# EAGLE board ESP32_GPS_Motion_Shield (EAGLE 7.7.0)
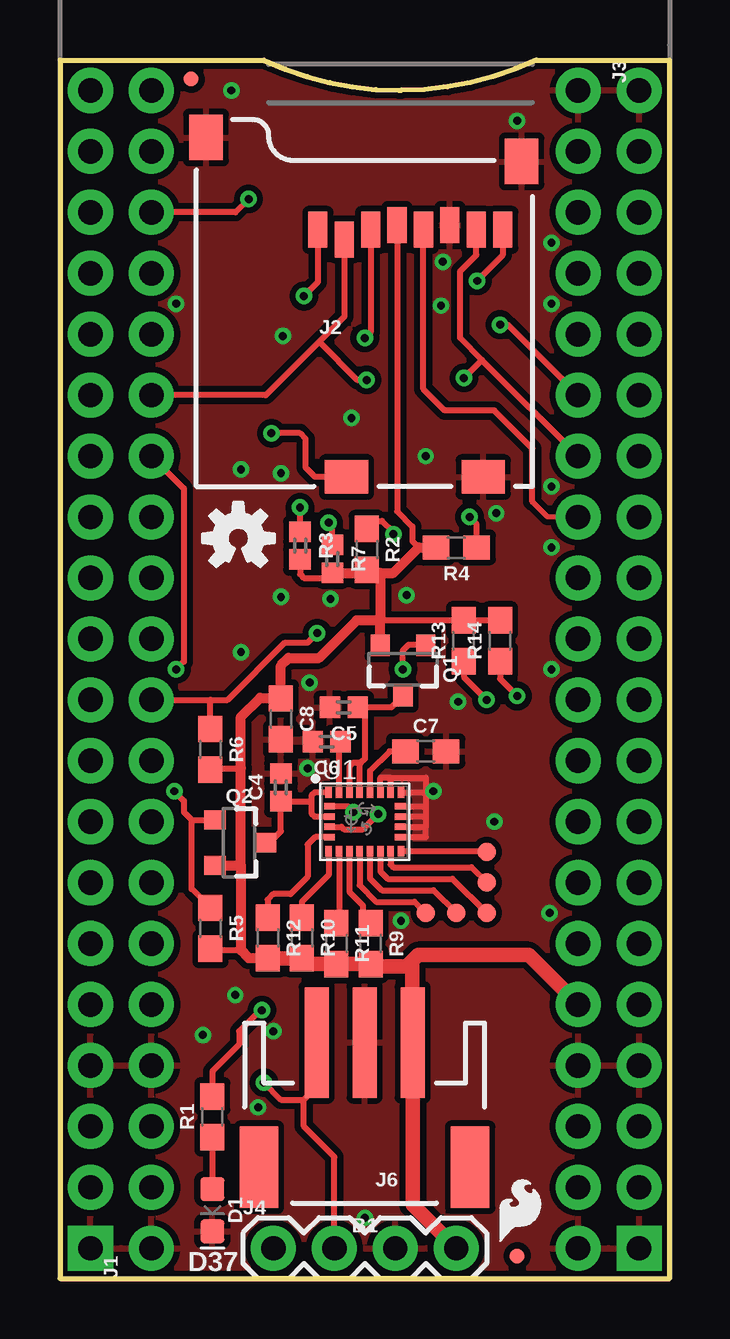
[diagram p0: board, top side]
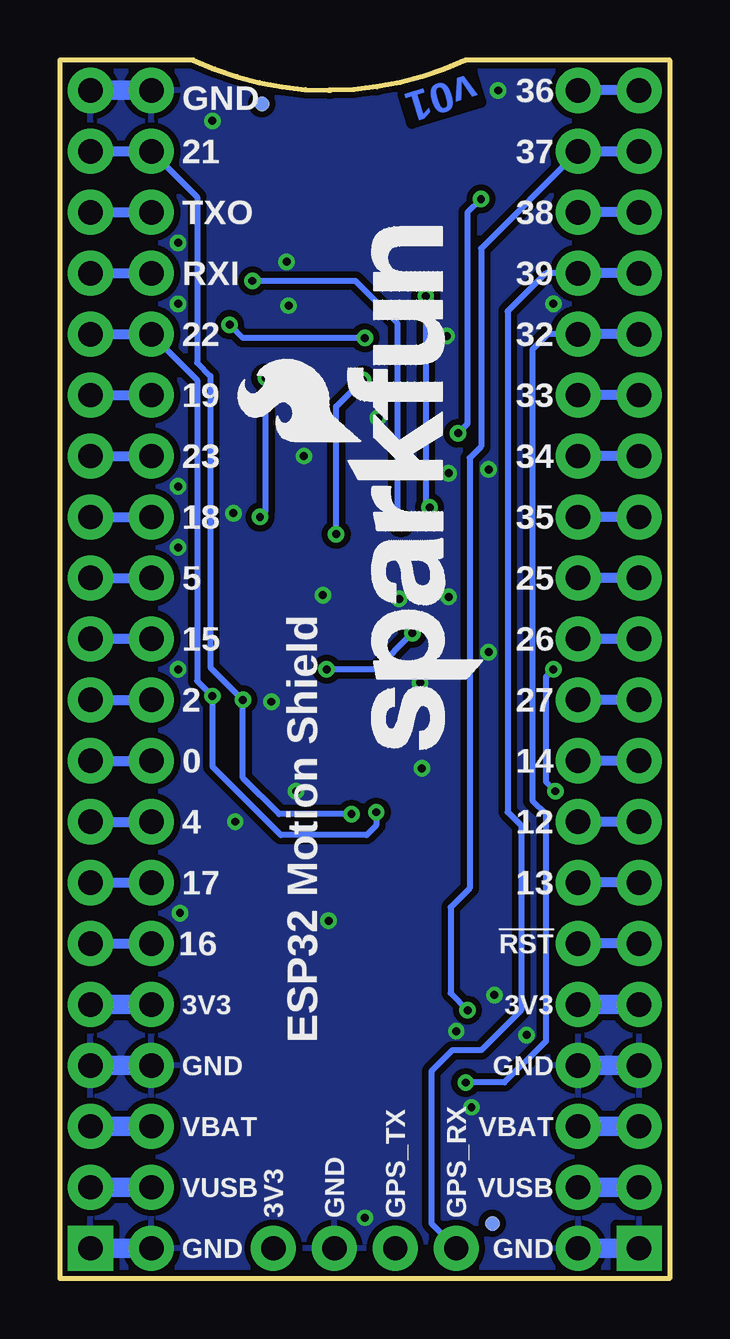
[diagram p1: board, bottom side, seen from below]

Size 25.4 x 50.8 mm. Coordinates in mm from the lower left corner, seen from the top.
Outline: 0,0 25.4,0 25.4,50.8 19.84,50.8 arc-25 14.21,49.53 14.13,49.53 arc-25 8.49,50.8 0,50.8 0,0
Copper layers (1*16): Top 0.035mm / dielectric 1.5mm / Bottom 0.035mm
Design rules "SparkFun-2-layer-TIGHT *": minimum track width 7mil, minimum drill 13mil, track to track 7mil, track to pad 7mil, pad to pad 7mil, via to via 7mil, smd to smd 7mil, copper to edge 7mil, drill to drill 7mil, minimum pad ring 7mil, minimum via ring 7mil, stop-mask expansion 4mil, vias tented up to drill 25mil, thermal gap 10mil

## Footprints (pad centres in the part's own frame; a part is rotated, then mirrored left to right if it is on the bottom)
ESP32_THING_NO_ANT = drill 1.016 pad 1.88 square: 1 1.27,1.27; 40 24.13,1.27 | drill 1.016 pad 1.88: 2 1.27,3.81; 3 1.27,6.35; 4 1.27,8.89; 5 1.27,11.43; 6 1.27,13.97; 7 1.27,16.51; 8 1.27,19.05; 9 1.27,21.59; 10 1.27,24.13; 11 1.27,26.67; 12 1.27,29.21; 13 1.27,31.75; 14 1.27,34.29; 15 1.27,36.83; 16 1.27,39.37; 17 1.27,41.91; 18 1.27,44.45; 19 1.27,46.99; 20 1.27,49.53; 21 24.13,49.53; 22 24.13,46.99; 23 24.13,44.45; 24 24.13,41.91; 25 24.13,39.37; 26 24.13,36.83; 27 24.13,34.29; 28 24.13,31.75; 29 24.13,29.21; 30 24.13,26.67; 31 24.13,24.13; 32 24.13,21.59; 33 24.13,19.05; 34 24.13,16.51; 35 24.13,13.97; 36 24.13,11.43; 37 24.13,8.89; 38 24.13,6.35; 39 24.13,3.81
0402 = smd 0.85 x 0.9: 1 -0.58,0; 2 0.58,0
0603 = smd 1.1 x 1: 1 -0.85,0; 2 0.85,0
LED-0603 = smd 1 x 1: A -0.877,0; C 0.877,0
FIDUCIAL-MICRO = smd 0.635 x 0.635: 1 0,0
1X20_NOSILK = drill 1.016 pad 1.88: 1 0,0; 2 2.54,0; 3 5.08,0; 4 7.62,0; 5 10.16,0; 6 12.7,0; 7 15.24,0; 8 17.78,0; 9 20.32,0; 10 22.86,0; 11 25.4,0; 12 27.94,0; 13 30.48,0; 14 33.02,0; 15 35.56,0; 16 38.1,0; 17 40.64,0; 18 43.18,0; 19 45.72,0; 20 48.26,0
MICRO-SD-SOCKET = smd 1.8 x 1.4: CD1 -2.05,0.4; CD2 -7.75,0.4 | smd 0.8 x 1.5: CS -7.84,10.3; DI -6.74,10.7; DO -2.34,10.7; GND -3.44,10.9; RSV1 -8.94,10.7; RSV2 -1.24,10.7; SCLK -4.54,10.7; VCC -5.64,10.9 | smd 1.4 x 1.9: GND1 -13.6,14.55; GND3 -0.45,13.55
1X04 = drill 1.016 pad 1.88: 1 0,0; 2 2.54,0; 3 5.08,0; 4 7.62,0
JST-3-SMD = smd 1 x 4.6: 1 2.01,-4.77; 2 0.01,-4.77; 3 -1.99,-4.77 | smd 1.6 x 3.4: NC1 -4.39,0.43; NC2 4.41,0.43
SOT23-3 = smd 0.8 x 0.9: 1 -0.95,-1; 2 0.95,-1; 3 0,1.1
PAD.03X.03 = smd 0.762 x 0.762: P$1 0,0
LGA24-8X4 = smd 0.27 x 0.45: 1 -1.505,1.225; 6 -1.505,-1.225; 7 -1.075,-1.225; 8 -0.645,-1.225; 9 -0.215,-1.225; 10 0.215,-1.225; 11 0.645,-1.225; 12 1.075,-1.225; 13 1.505,-1.225; 18 1.505,1.225; 19 1.075,1.225; 20 0.645,1.225; 21 0.215,1.225; 22 -0.215,1.225; 23 -0.645,1.225; 24 -1.075,1.225 | smd 0.45 x 0.27: 2 -1.475,0.645; 3 -1.475,0.215; 4 -1.475,-0.215; 5 -1.475,-0.645; 14 1.475,-0.645; 15 1.475,-0.215; 16 1.475,0.215; 17 1.475,0.645

## Placement (x,y rotation side)
B1  ESP32_THING_WO_ANT_KEEPOUT  [ESP32_THING_NO_ANT]  0,0 0 top
C4  0.1uF  [0402]  9.21,20.48 90 top
C5  0.1uF  [0402]  11.83,23.81 180 top
C6  0.1uF  [0402]  11.11,22.38 180 top
C7  10nF  [0603]  15.24,21.99 0 top
C8  10uF  [0603]  9.21,23.34 270 top
D1  BLUE  [LED-0603]  6.35,2.86 270 top
FD1  FIDUCIALUFIDUCIAL  [FIDUCIAL-MICRO]  19.05,0.95 0 top
FD2  FIDUCIALUFIDUCIAL  [FIDUCIAL-MICRO]  5.46,50.01 0 top
FD3  FIDUCIALUFIDUCIAL  [FIDUCIAL-MICRO]  16.99,48.97 0 bottom
FD4  FIDUCIALUFIDUCIAL  [FIDUCIAL-MICRO]  7.38,2.3 0 bottom
FRAME1  FRAME-LETTER  [CREATIVE_COMMONS]  -23.7,-19.91 0 top  (outside the outline)
J1  [1X20_NOSILK]  3.81,1.27 90 top
J2  MICRO-SD_CARD_SOCKET  [MICRO-SD-SOCKET]  19.68,33.02 0 top
J3  [1X20_NOSILK]  21.59,49.53 270 top
J4  [1X04]  8.89,1.27 0 top
J6  3-PIN SMD  [JST-3-SMD]  12.7,5.08 180 top
LOGO1  OSHW-LOGOS  [OSHW-LOGO-S]  7.43,30.86 0 top
LOGO2  SFE_LOGO_NAME_FLAME.2_INCH  [SFE_LOGO_NAME_FLAME_.2]  7.7,21.35 90 bottom
LOGO3  SFE_LOGO_FLAME.1_INCH  [SFE_LOGO_FLAME_.1]  18.02,1.21 0 top
Q1  4.3A/20V/54mΩ  [SOT23-3]  14.29,25.4 180 top
Q2  4.3A/20V/54mΩ  [SOT23-3]  7.46,18.18 270 top
R1  470  [0603]  6.35,6.75 90 top
R2  10k  [0603]  12.78,30.4 270 top
R3  100K  [0402]  10,30.56 270 top
R4  10k  [0603]  16.51,30.48 180 top
R5  10k  [0603]  6.27,14.61 270 top
R6  10k  [0603]  6.27,22.07 270 top
R7  100K  [0402]  11.35,30 270 top
R9  10k  [0603]  12.94,13.97 270 top
R10  10k  [0603]  10.08,14.21 270 top
R11  10k  [0603]  11.51,13.97 270 top
R12  10k  [0603]  8.65,14.21 270 top
R13  4.7k  [0603]  16.83,26.59 90 top
R14  4.7k  [0603]  18.34,26.59 90 top
TP1  TEST-POINT3  [PAD.03X.03]  17.78,15.24 90 top
TP2  TEST-POINT3  [PAD.03X.03]  17.78,16.51 90 top
TP3  TEST-POINT3  [PAD.03X.03]  17.78,17.78 90 top
TP4  TEST-POINT3  [PAD.03X.03]  15.24,15.24 90 top
TP5  TEST-POINT3  [PAD.03X.03]  16.51,15.24 90 top
U1  LSM9DS1  [LGA24-8X4]  12.7,19.05 0 top

## Library data of the parts
B1 = SparkFun-Boards
C4-C6 = SparkFun-Capacitors; PROD_ID: CAP-12416
C7 = SparkFun-Capacitors; PROD_ID: CAP-00867
C8 = SparkFun-Capacitors; PROD_ID: CAP-11015
D1 = SparkFun-LED; PROD_ID: DIO-08575
FD1-FD4 FRAME1 LOGO1-LOGO3 = SparkFun-Aesthetics
J1 J3 TP1-TP5 = SparkFun-Connectors
J2 = SparkFun-Connectors; PROD_ID: CONN-07820; SF_ID: PRT-00127
J4 = SparkFun-Connectors; PROD_ID: CONN-09696
J6 = SparkFun-Connectors; PROD_ID: CONN-12591
Q1 Q2 = SparkFun-DiscreteSemi; PROD_ID: TRANS-11153
R1 = SparkFun-Resistors; PROD_ID: RES-07869
R2 R4-R6 R9-R12 = SparkFun-Resistors; PROD_ID: RES-00824
R3 R7 = SparkFun-Resistors; PROD_ID: RES-13495
R13 R14 = SparkFun-Resistors; PROD_ID: RES-07857
U1 = LSM9DS1_temp; PROD_ID: IC-12536

## Nets
3.3V: B1.36 C8.1 J2.VCC J3.16 J4.4 J6.3 Q1.2 Q2.2 R2.2 R3.2 R4.2 R5.2 R6.2 R7.2 R9.2 R10.2 R11.2 R12.2 R13.2 R14.2
3.3V_B: B1.5 J1.5
C1: C6.1 U1.24
CAP: C7.1 U1.21
CS_A/G: R11.1 U1.7
CS_M: R9.1 U1.8
DEN_A/G: TP3.P$1 U1.13
DRDY_M: TP4.P$1 U1.9
GND: B1.1 B1.4 B1.21 B1.37 B1.40 C4.2 C5.2 C6.2 C7.2 C8.2 D1.C J1.1 J1.4 J2.CD1 J2.GND J2.GND1 J2.GND3 J3.1 J3.17 J3.20 J4.3 J6.2 U1.14 U1.15 U1.16 U1.17 U1.18 U1.19 U1.20
GPS_LED: B1.19 J1.19 R1.2
GPS_RX: B1.17 J1.17 J4.1
GPS_TX: B1.16 J1.16 J4.2 J6.1
INT1_A/G: TP1.P$1 U1.11
INT2_A/G: TP2.P$1 U1.12
INT_M: TP5.P$1 U1.10
N$1: D1.A R1.1
N$2: B1.30 J3.10
N$9: J2.RSV1 R3.1
N$10: J2.RSV2 R7.1
N$15: B1.6 J1.6
N$16: B1.7 J1.7
N$17: B1.8 J1.8
N$18: B1.9 J1.9
N$20: B1.11 J1.11
N$21: B1.12 J1.12
N$22: B1.13 J1.13
N$23: B1.20 J1.20
N$32: B1.23 J3.3
N$33: B1.24 J3.4
N$38: B1.29 J3.9
N$40: B1.31 J3.11
N$41: B1.32 J3.12
N$42: B1.33 J3.13
N$43: B1.34 J3.14
N$44: B1.35 J3.15
SCL: B1.25 J3.5 R14.1 U1.2
SD_CD: B1.18 J1.18 J2.CD2
SD_CS: B1.15 J1.15 J2.CS R2.1
SD_DI: B1.26 J2.DI J3.6
SD_DO: B1.27 J2.DO J3.7 R4.1
SD_SCK: B1.28 J2.SCLK J3.8
SDA: B1.22 J3.2 R13.1 U1.4
SDO_A/G: R12.1 U1.5
SDO_M: R10.1 U1.6
V_BATT: B1.38 J3.18
V_BATT_B: B1.3 J1.3
VDD: C5.1 Q1.3 U1.22 U1.23
VDD_CTRL: B1.10 J1.10 Q1.1 R6.1
VDDIO: C4.1 Q2.3 U1.1 U1.3
VDDIO_CTRL: B1.14 J1.14 Q2.1 R5.1
VUSB: B1.39 J3.19
VUSB_B: B1.2 J1.2

## Tracks (layer width: path | path; a pad name or v marks a point on that pad's centre or on a via)
3.3V
  Top 0.254: J2.VCC 14.04,31.99 14.68,31.35 14.68,30.74 14.95,30.48 | 7.54,17.23 7.54,17.22 | Q1.2 | 9.18,24.21 C8.1 | R10.2 10.08,13.26 | 7.54,13.68 6.27,13.68 R5.2 | R6.2 6.33,21.27 7.54,21.27 | R3.2 10,29.37 10.16,29.21 11.14,29.21 | R14.2 R13.2 13.34,27.44 | R2.2 12.89,29.44 13.88,29.44 13.89,29.42
  Top 0.406: 7.54,17.22 7.54,21.27 7.54,23.42 8.33,24.21 9.18,24.21 | C8.1 9.21,25.56 9.53,25.88 10.79,25.88 12.36,27.44 13.34,27.44 13.34,29.42 | Q2.2 7.54,17.23 7.54,13.68 7.86,13.36 R12.2 | 11.14,29.21 R7.2 13.34,29.42 | Q1.2 13.34,27.44 | 13.34,29.42 13.89,29.42 14.95,30.48 R4.2
  Top 0.61: R12.2 R10.2 10.32,13.12 R11.2 R9.2 13.04,13.02 14.45,13.02 14.68,13.26 | J3.16 19.53,13.49 14.92,13.49 14.68,13.26 | 14.68,13.26 J6.3 14.69,3.09 J4.4
  Bottom 0.813: B1.36 J3.16
3.3V_B
  Bottom 0.813: B1.5 J1.5
C1
  Top 0.254: U1.24 11.62,22.38 C6.1
CAP
  Top 0.254: C7.1 13.73,21.99 12.91,21.17 U1.21
CS_A/G
  Top 0.254: U1.7 11.62,14.94 R11.1
CS_M
  Top 0.254: U1.8 12.05,16.12 12.62,15.56 12.62,15.14 R9.1
DEN_A/G
  Top 0.254: U1.13 17.73,17.82 TP3.P$1
DRDY_M
  Top 0.254: U1.9 12.48,16.41 13.18,15.72 14.76,15.72 TP4.P$1
GND  (via drill 0.33)
  Top 0.254: U1.14 15.24,18.41 15.24,18.84 | U1.15 15.24,18.84 | U1.16 15.24,19.27 | 15.24,19.27 15.24,18.84 | U1.17 15.24,19.7 | 15.24,19.7 15.24,19.27 | U1.18 15.24,20.27 | 15.24,20.27 15.24,19.7 | U1.19 13.78,20.88 | 13.78,20.88 13.35,20.88 U1.20 | 13.78,20.88 15.24,20.88 15.24,20.27
  Bottom 0.813: J3.1 B1.21 | B1.4 J1.4 | B1.1 J1.1 | B1.40 J3.20 | B1.37 J3.17
  other vias: 7.54,33.73 20.48,33.02 15.88,40.56 4.84,40.64 8.26,7.14 12.7,2.54 5.95,10.16 20.4,15.24 18.1,19.05 16.59,24.05 20.48,25.4 20.48,30.48 10.32,21.27 10.4,24.84 15.24,34.29 12.14,35.88 9.21,33.58 9.29,39.29 18.18,31.91 7.14,49.53 19.05,48.26 15.95,42.39 20.48,40.64 20.48,43.18 15.56,20.32 14.21,14.92 7.3,11.83 11.27,28.34 7.54,26.11 9.21,28.42 8.89,10.32 14.45,28.5
  pour Top (isolate 0.254): 0,50.8 0,0 25.4,0 25.4,50.8
  pour Bottom (isolate 0.254): 25.4,50.8 25.4,0 0,0 0,50.8
GPS_LED  (via drill 0.33)
  Top 0.254: v8.41,11.19 8.33,11.19 7.46,10.32 7.46,9.76 6.35,8.65 R1.2
  Bottom 0.254: J1.19 7.86,42.94 7.86,34.69 8.33,34.21 8.33,16.27 9.13,15.48 9.13,11.91 v8.41,11.19
  Bottom 0.406: J1.19 B1.19
GPS_RX
  Bottom 0.254: J1.17 5.16,41.91 6.75,40.32 6.75,19.45 6.19,18.89 6.19,11.19 7.86,9.53 9.05,9.53 9.92,8.65 9.92,2.3 J4.1
  Bottom 0.406: B1.17 J1.17
GPS_TX  (via drill 0.33)
  Top 0.254: 10.16,7.46 10.72,8.02 10.72,9.82 J6.1 | J4.2 11.43,5.08 10.16,6.35 10.16,7.46 | v8.49,8.18 9.21,7.46 10.16,7.46
  Bottom 0.254: J1.16 5.08,39.37 5.71,38.73 5.71,19.92 5.16,19.37 5.16,9.9 6.88,8.18 v8.49,8.18
  Bottom 0.406: B1.16 J1.16
INT1_A/G
  Top 0.254: U1.11 13.35,16.98 13.65,16.67 16.35,16.67 TP1.P$1
INT2_A/G
  Top 0.254: U1.12 13.78,17.26 13.89,17.14 17.14,17.14 TP2.P$1
INT_M
  Top 0.254: U1.10 12.91,16.69 13.41,16.19 15.56,16.19 TP5.P$1
N$1
  Top 0.254: R1.1 D1.A
N$2
  Bottom 0.406: J3.10 B1.30
N$9  (via drill 0.33)
  Top 0.254: J2.RSV1 10.74,41.54 v10.16,40.96 | R3.1 v10,32.15
  Bottom 0.254: v10.16,40.96 10.16,32.31 v10,32.15
N$10  (via drill 0.33)
  Top 0.254: J2.RSV2 18.45,42.65 v17.38,41.59 | R7.1 11.35,31.35 v11.19,31.51
  Bottom 0.254: v17.38,41.59 13.1,41.59 11.35,39.85 11.35,31.67 v11.19,31.51
N$15
  Bottom 0.406: B1.6 J1.6
N$16
  Bottom 0.406: B1.7 J1.7
N$17
  Bottom 0.406: B1.8 J1.8
N$18
  Bottom 0.406: B1.9 J1.9
N$20
  Bottom 0.406: B1.11 J1.11
N$21
  Bottom 0.406: B1.12 J1.12
N$22
  Bottom 0.406: B1.13 J1.13
N$23
  Bottom 0.406: B1.20 J1.20
N$32
  Bottom 0.406: B1.23 J3.3
N$33
  Bottom 0.406: B1.24 J3.4
N$38
  Bottom 0.406: B1.29 J3.9
N$40
  Bottom 0.406: B1.31 J3.11
N$41
  Bottom 0.406: B1.32 J3.12
N$42
  Bottom 0.406: B1.33 J3.13
N$43
  Bottom 0.406: B1.34 J3.14
N$44
  Bottom 0.406: B1.35 J3.15
SCL  (via drill 0.33)
  Top 0.254: U1.2 11.98,19.7 v12.22,19.45 | R14.1 18.34,25 v19.05,24.29
  Bottom 0.254: J3.5 19.68,37.47 19.68,24.92 v19.05,24.29 19.05,21.35 16.19,18.49 12.62,18.49 12.22,18.89 v12.22,19.45
  Bottom 0.406: B1.25 J3.5
SD_CD  (via drill 0.33)
  Top 0.254: J2.CD2 10.63,33.42 10.24,33.81 10.24,35 10,35.24 v8.81,35.24 | v7.86,45.01 7.3,44.45 J1.18
  Bottom 0.254: v8.81,35.24 8.41,35.64 8.41,44.45 v7.86,45.01
  Bottom 0.406: B1.18 J1.18
SD_CS  (via drill 0.33)
  Top 0.254: J2.CS 11.85,40.1 10.79,39.05 | 10.79,39.05 8.57,36.83 J1.15 | 10.79,39.05 12.38,37.47 v12.78,37.47 | R2.1 13.12,31.59 13.41,31.59 13.89,31.11 v13.89,31.04
  Bottom 0.254: v13.89,31.04 13.89,36.35 v12.78,37.47
  Bottom 0.406: B1.15 J1.15
SD_DI  (via drill 0.33)
  Top 0.254: J2.DI 12.95,39.46 v12.7,39.21 | v18.34,39.77 18.65,39.77 J3.6
  Bottom 0.254: v12.7,39.21 17.78,39.21 v18.34,39.77
  Bottom 0.406: B1.26 J3.6
SD_DO  (via drill 0.33)
  Top 0.254: J2.DO 17.34,42.67 16.67,41.99 16.67,39.21 17.58,38.3 | J3.7 17.58,38.3 | v16.83,37.54 17.58,38.3 | R4.1 17.36,31.46 v17.07,31.75
  Bottom 0.254: v16.83,37.54 16.83,31.99 v17.07,31.75
  Bottom 0.406: B1.27 J3.7
SD_SCK
  Top 0.203: J3.8 20.32,31.75 19.68,32.38
  Top 0.254: 19.68,32.38 19.68,34.61 18.1,36.2 16.03,36.2 15.14,37.08 J2.SCLK
  Bottom 0.406: B1.28 J3.8
SDA  (via drill 0.33)
  Top 0.254: v13.26,19.37 12.62,18.73 11.83,18.73 11.72,18.84 U1.4 | R13.1 16.83,25.08 v17.78,24.13
  Bottom 0.254: J3.2 19.68,45.09 19.68,38.18 19.13,37.62 19.13,25.48 v17.78,24.13 17.78,20.88 16.27,19.37 v13.26,19.37
  Bottom 0.406: B1.22 J3.2
SDO_A/G
  Top 0.254: U1.5 10.63,18.41 10.32,18.1 10.32,16.75 9.6,16.03 8.89,16.03 8.65,15.8 R12.1
SDO_M
  Top 0.254: U1.6 11.2,16.83 10.08,15.72 R10.1
V_BATT
  Bottom 0.813: B1.38 J3.18
V_BATT_B
  Bottom 0.813: B1.3 J1.3
VDD
  Top 0.254: U1.23 12.05,21.34 12.22,21.51 12.54,21.51 | U1.22 12.48,21.45 12.54,21.51 | 12.54,21.51 12.7,21.67 12.7,23.65 12.54,23.81 C5.1 13.81,23.81 Q1.3
VDD_CTRL  (via drill 0.33)
  Top 0.254: J1.10 6.27,24.13 | 6.27,24.13 6.99,24.13 9.37,26.51 10.32,26.51 v10.72,26.91 | R6.1 6.27,24.13 | v14.29,25.4 14.29,26.19 14.53,26.43 15.21,26.43 Q1.1
  Bottom 0.254: v10.72,26.91 12.22,25.4 v14.29,25.4
  Bottom 0.406: B1.10 J1.10
VDDIO
  Top 0.254: U1.1 10.62,20.27 10.48,20.14 10.48,19.92 | 10.48,19.92 10.48,19.39 10.61,19.27 U1.3 | Q2.3 8.73,18.18 9.21,18.65 C4.1 10.45,19.9 10.48,19.92
VDDIO_CTRL  (via drill 0.33)
  Top 0.254: J1.14 5.16,32.94 5.16,25.72 v4.84,25.4 | v4.76,20.32 5.16,19.92 5.16,19.45 5.48,19.13 | 5.48,19.13 Q2.1 | R5.1 5.48,16.25 5.48,19.13
  Bottom 0.254: v4.84,25.4 5.16,25.08 5.16,20.72 v4.76,20.32
  Bottom 0.406: B1.14 J1.14
VUSB
  Bottom 0.813: B1.39 J3.19
VUSB_B
  Bottom 0.813: B1.2 J1.2

## Text on the board
Bottom: v01
tPlace: D37
bPlace: 36 | GND | 37 | 21 | 38 | TXO | 39 | RXI | 32 | 22 | 33 | 19 | 34 | 23 | 35 | 18 | 25 | 5 | 26 | 15 | 27 | 2 | 14 | 0 | 12 | ESP32 Motion Shield | 4 | 13 | 17 | !RST! | 16 | 3V3 | 3V3 | GND | GND | VBAT | VBAT | VUSB | VUSB | GPS_RX | GPS_TX | GND | 3V3 | GND | GND
Measures: Units are in Inches
tDocu: Marshall Taylor